# Altium PCB 123.PcbDoc
Units mil, origin at the board's own origin, x right, y up, seen from the top; angles counter-clockwise.
Board outline 27559.06 x 27559.06 mil, 2 copper layers (TopLayer, BottomLayer); 43 components, 558 nets, 272 pads, 0 vias.
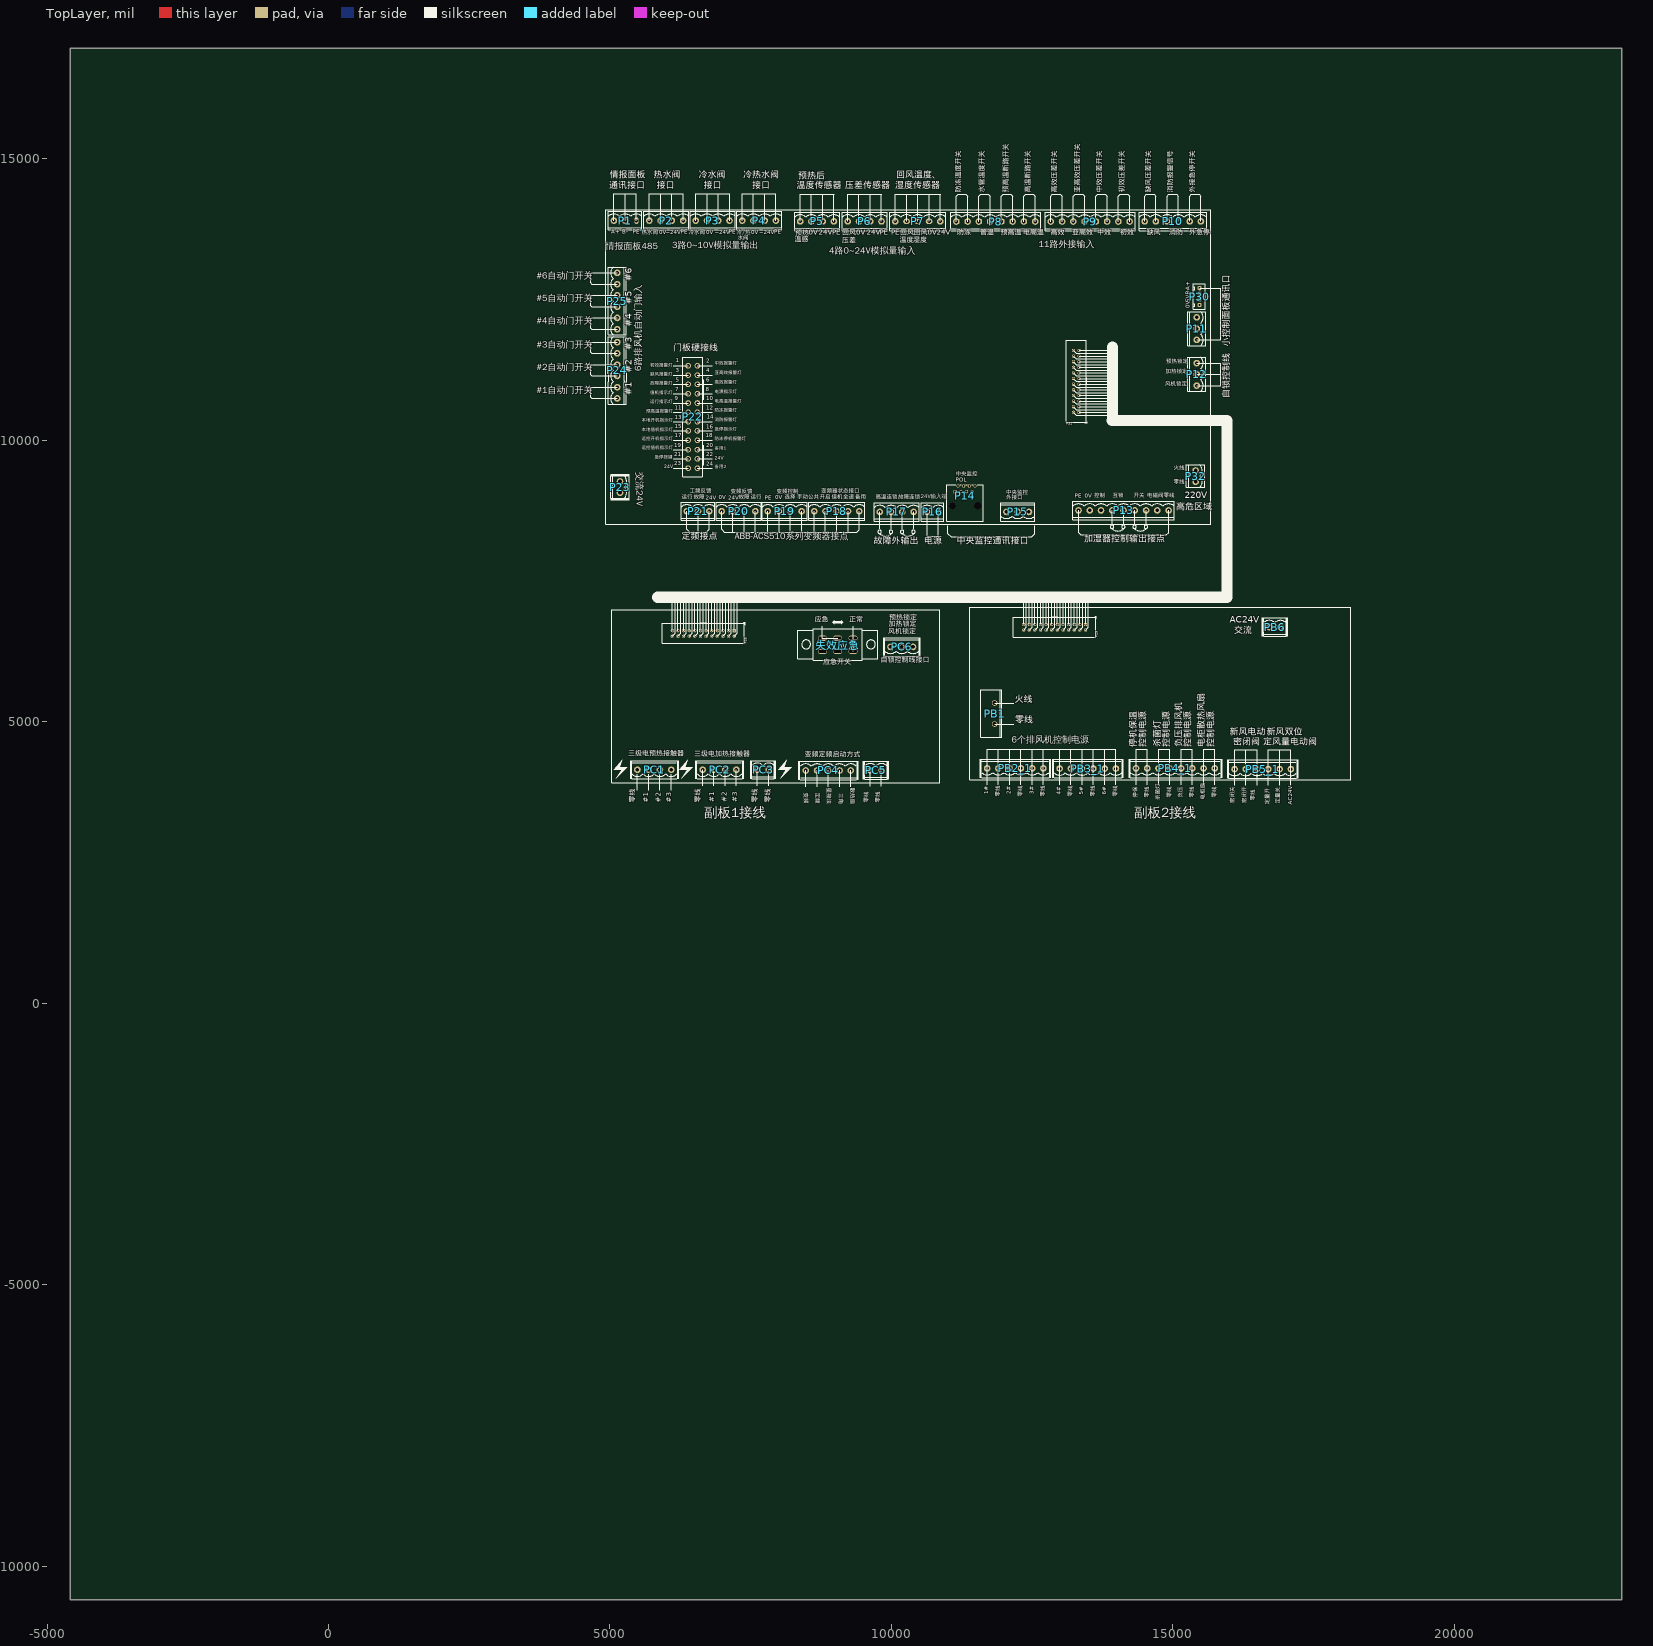
[diagram p0: TopLayer view]
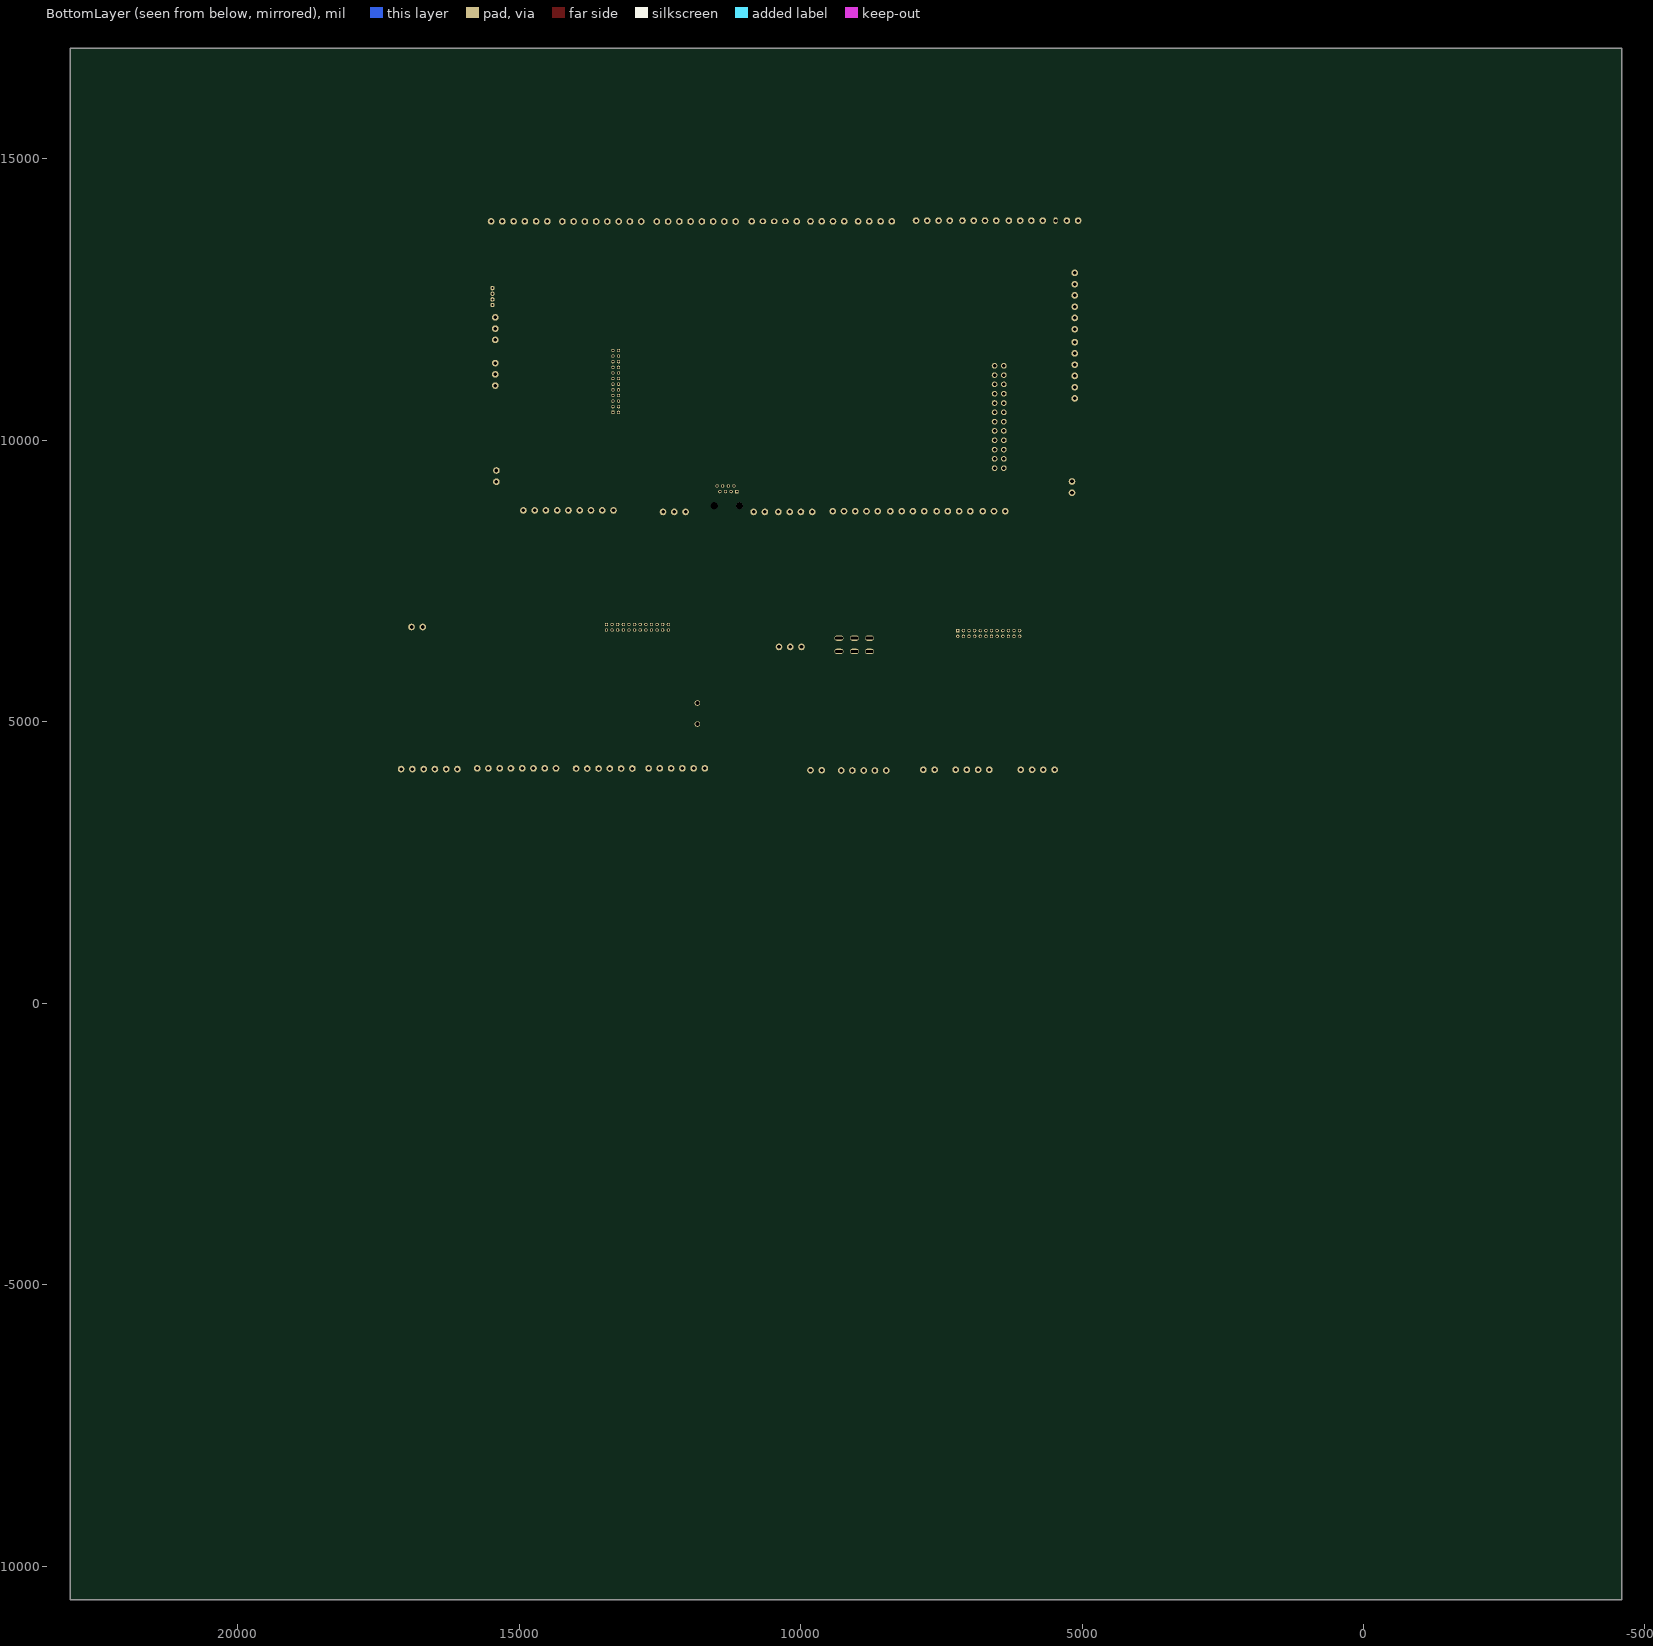
[diagram p1: BottomLayer view, seen from below]

## Layer stack, top to bottom
TopSolder: solder mask 0.4, Solder Resist, Dk 3.5
TopLayer: signal copper 1.4
Dielectric1: dielectric 12.6, FR-4, Dk 4.8
BottomLayer: signal copper 1.4
BottomSolder: solder mask 0.4, Solder Resist, Dk 3.5

## Board outline
-4585.22,16963.99 22973.83,16963.99 22973.83,-10595.06 -4585.22,-10595.06

## Design rules (kind name [scope] priority, off if disabled: settings)
Clearance Clearance_2 [All] p1: gap=8
Clearance Clearance_1 [All] p2 off: gap=20
Clearance [All] p3 off: gap=15
ComponentClearance [All] p1 off: gap=10 collisioncheckmode=3 verticalgap=10 showdistances=FALSE
FabricationTestPointUsage TestPointUsage [All] p1: valid=0 allowmultiple=FALSE
FabricationTestpoint Testpoint [(IsPad And (OnTopLayer Or OnBottomLayer))] p1: side=3 testpointundercomponent=TRUE minsize=40 maxsize=100 preferedsize=60 minholesize=20 maxholesize=40 preferedholesize=32 testpointgrid=1 allowsidetop=TRUE allowsidebottom=TRUE usegrid=TRUE gridtolerance=0.01
PolygonConnect PolygonConnect_1 [All vs (InPadClass('All Pads'))] p1: connectstyle=NoConnect reliefconductorwidth=10 reliefentries=4 polygonreliefangle="90 Angle" airgapwidth=10
PolygonConnect [All] p2: connectstyle=Direct reliefconductorwidth=10 reliefentries=4 polygonreliefangle="90 Angle" airgapwidth=10
RoomDefinition PolXMain [InComponentClass('PolXMain')] p1: confinementstyle=ConfineIn formatcopy=TRUE lockcomponents=FALSE outline 23018.83,-10508.12 61763.06,-10508.12 61763.06,-7249.06 23018.83,-7249.06
RoutingVias [All] p1: holewidth=15 width=25 viastyle="Through Hole" minholewidth=15 minwidth=25 maxholewidth=15 maxwidth=25
ShortCircuit [All] p1 off: allowed=FALSE
SilkToSolderMaskClearance SilkscreenOverComponentPads [IsPad] p1: minsilkscreentomaskgap=10 clearancetoexposedcopper=TRUE
SolderMaskExpansion [All] p1: expansion=4
Width [All] p1: maxlimit=300 minlimit=10 preferedwidth=30
24 further rules are at their usual default settings.

## Classes and differential pairs
component class PolXMain: C77

## Components (designator, comment, footprint, x,y, rotation, side; value= is the part's Value field where it differs from the comment)
P1 "" PL3X#1 5470,13905 r180 top (schematic designator 485-1)
P2 "热水执行" PL4X 6000,13905 r180 top (schematic designator 热水阀执行1)
P3 "冷水执行" PL4X 6825,13905 r0 top (schematic designator 冷水阀执行1)
P4 "冷/热水阀" PL4X 7650,13905 r180 top (schematic designator 冷/热水阀1)
P5 "N1000" PL4X 8680,13890 r0 top (schematic designator 预热温感1)
P6 "压差" PL4X 9525,13890 r180 top (schematic designator 压差传感器1)
P7 "回风温湿" PL5X#1 10470,13890 r0 top (schematic designator 回风温湿传感器1)
P8 "DI-3" PL8X 11855,13888.56 r180 top (schematic designator P1)
P9 "DI-2" PL8X 13532.96,13888.56 r0 top (schematic designator P5)
P10 "DI-1" PL6X 15000,13890 r180 top (schematic designator P9)
P11 "" PL3X#2 15424.5,11785 r90 top (schematic designator 485-2)
P12 "Header 3" PL3X#2 15424.5,11373.16 r270 top (schematic designator P25)
P13 "Header 9" PL9X 14125,8755 r0 top (schematic designator 加湿器1)
P14 "Header 4X2" RH45 11310,9015 r0 top
P15 "Header 3" PL3X#2 12045,8728.56 r0 top
P16 "power" PL2X 10735,8728.56 r0 top (schematic designator 24V)
P17 "硬接线" PL4X 10095,8728.56 r180 top (schematic designator 电柜内部1)
P18 "硬接线" PL5X#2 9030,8740 r180 top (schematic designator 变频1)
P19 "硬接线" PL4X 8105,8740 r180 top (schematic designator 变频2)
P20 "变频反馈" PL4X 7285,8740 r180 top (schematic designator 变频3)
P21 "工频反馈" PL3X#2 6365,8740 r0 top (schematic designator 电柜内部2)
P22 "硬接线" ATX_24PIN 6389.65,11324.9 r270 top (schematic designator 门控指示灯1)
P23 "硬接线" PL2XQ 5179.44,9169.84 r90 top
P24 "自动门" PL6X 5130,11245 r270 top (schematic designator P14)
P25 "自动门" PL6X 5130,12475 r90 top (schematic designator P17)
P28 "Con2*12-1mm" FC24LX 6658.9,6570 r180 top (schematic designator P27)
P29 "Con2*12-1mm" FC24LX 12900,6680 r180 top (schematic designator P27)
P30 "硬接线" C3-4 15475,12555 r90 top (schematic designator 220V)
P31 "Con2*12-1mm" FC24LX 13285,11047.78 r90 top (schematic designator P27)
P32 "硬接线" PL2X 15405,9365 r90 top
PB1 "硬接线" 95-2P 11835,4960 r90 top (schematic designator AC24Vin2)
PB2_1 "Header 6" PL6XQ 12201.74,4172.85 r0 top (schematic designator 客户接线2)
PB3_1 "Header 6" PL6XQ 13490,4170 r0 top (schematic designator 客户接线3)
PB4_1 "Header 8" PL8XQ 15046.74,4172.85 r0 top (schematic designator 杀菌/停保)
PB5_1 "硬接线" PL6XQ 16597.4,4160.47 r0 top (schematic designator 客接新?)
PB6 "硬接线" PL2XQ 16813.22,6684.27 r180 top (schematic designator AC24Vin2)
PC1 "Header 4" PL4XQ 5788.89,4148.47 r0 top (schematic designator 再热)
PC2 "Header 4" PL4XQ 6947.2,4148.47 r0 top (schematic designator 预热)
PC3 "硬接线" PL2XQ 7719.72,4148.47 r180 top (schematic designator P24)
PC4 "硬接线" PL5XQ 8880,4135 r180 top (schematic designator 送风机)
PC5 "硬接线" PL2XQ 9725,4140 r180 top (schematic designator P24)
PC6 "Header 3" PL3XQ 9985,6330 r0 top (schematic designator 火线)
失效应急 "Header 6" SW220V 9048.15,6367.91 r0 top

## Footprints (in the part's own frame and the unit in brackets; to place one, negate y for a bottom-side part, rotate by r counter-clockwise, add the part's x,y. Pads: shape width x height; smd on the part's side, far side on the other; paste and mask are expansions set on the pad)
95-2P [mm]
  round 2.5 hole 1.8: 1(0,0) 2(9.5,0)
  silkscreen extent -6,-3.3 15.5,6.28
ATX_24PIN [mm]
  round 2.54 hole 1.6: 1(0,0) 2(0,4.2) 3(4.2,0) 4(4.2,4.2) 5(8.4,0) 6(8.4,4.2) 7(12.6,0) 8(12.6,4.2) 9(16.8,0) 10(16.8,4.2) 11(21,0) 12(21,4.2) 13(25.2,0) 14(25.2,4.2) 15(29.4,0) 16(29.4,4.2) 17(33.6,0) 18(33.6,4.2) 19(37.8,0) 20(37.8,4.2) 21(42,0) 22(42,4.2) 23(46.2,0) 24(46.2,4.2)
  silkscreen extent -3.82,-2.51 50.01,7.1
C3-4 [mm]
  round 2 hole 1: 1(-3.81,0) 2(-1.27,0) 3(1.27,0) 4(3.81,0)
  silkscreen extent -5.71,-2.54 5.71,2.79, body extent -5.79,-2.62 5.79,2.87, height 10
FC24LX [mm]
  rect 1.5x1.5 hole 0.9: 1(-13.97,-1.27)
  round 1.5 hole 0.9: 2(-13.97,1.27) 3(-11.43,-1.27) 4(-11.43,1.27) 5(-8.89,-1.27) 6(-8.89,1.27) 7(-6.35,-1.27) 8(-6.35,1.27) 9(-3.81,-1.27) 10(-3.81,1.27) 11(-1.27,-1.27) 12(-1.27,1.27) 13(1.27,-1.27) 14(1.27,1.27) 15(3.81,-1.27) 16(3.81,1.27) 17(6.35,-1.27) 18(6.35,1.27) 19(8.89,-1.27) 20(8.89,1.27) 21(11.43,-1.27) 22(11.43,1.27) 23(13.97,-1.27) 24(13.97,1.27)
  silkscreen extent -18.9,-5.01 18.54,4.5
PL2X [mm]
  round 3 hole 1.6: 1(-2.54,0) 2(2.54,0)
  silkscreen extent -5.08,-4.13 5.08,4.13
PL2XQ [mm]
  round 3 hole 1.6: 1(-2.54,0) 2(2.54,0)
  silkscreen extent -5.95,-4.25 5.95,4.25
PL3X#1 [mm]
  oval 1.905x3 hole 1.6: 1(0,0)
  round 3 hole 1.6: 2(5.08,0) 3(10.16,0)
  silkscreen extent -2.54,-4.13 12.7,4.13
PL3X#2 [mm]
  round 3 hole 1.6: 1(0,0) 2(5.08,0) 3(10.16,0)
  silkscreen extent -2.54,-4.13 12.7,4.13
PL3XQ [mm]
  round 3 hole 1.6: 1(0,0) 2(5.08,0) 3(10.16,0)
  silkscreen extent -3.41,-4.25 13.57,4.25
PL4X [mm]
  round 3 hole 1.6: 1(-7.62,0) 2(-2.54,0) 3(2.54,0) 4(7.62,0)
  silkscreen extent -10.16,-4.13 10.16,4.13
PL4XQ [mm]
  round 3 hole 1.6: 1(-7.62,0) 2(-2.54,0) 3(2.54,0) 4(7.62,0)
  silkscreen extent -11.03,-4.25 11.03,4.25
PL5X#1 [mm]
  round 3 hole 1.6: 1(-10.16,0) 5(10.16,0)
  oval 3x2.54 hole 1.6: 2(-5.08,0) 3(0,0) 4(5.08,0)
  silkscreen extent -12.7,-4.13 12.7,4.13
PL5X#2 [mm]
  round 3 hole 1.6: 1(-10.16,0) 2(-5.08,0) 3(0,0) 4(5.08,0) 5(10.16,0)
  silkscreen extent -12.7,-4.13 12.7,4.13
PL5XQ [mm]
  round 3 hole 1.6: 1(-10.16,0) 2(-5.08,0) 3(0,0) 4(5.08,0) 5(10.16,0)
  silkscreen extent -13.57,-4.25 13.57,4.25
PL6X [mm]
  round 3 hole 1.6: 1(-12.7,0) 2(-7.62,0) 3(-2.54,0) 4(2.54,0) 5(7.62,0) 6(12.7,0)
  silkscreen extent -15.24,-4.13 15.24,4.13
PL6XQ [mm]
  round 3 hole 1.6: 1(-12.7,0) 2(-7.62,0) 3(-2.54,0) 4(2.54,0) 5(7.62,0) 6(12.7,0)
  silkscreen extent -16.11,-4.25 16.11,4.25
PL8X [mm]
  round 3 hole 1.6: 1(-17.78,0) 2(-12.7,0) 3(-7.62,0) 4(-2.54,0) 5(2.54,0) 6(7.62,0) 7(12.7,0) 8(17.78,0)
  silkscreen extent -20.32,-4.13 20.32,4.13
PL8XQ [mm]
  round 3 hole 1.6: 1(-17.78,0) 2(-12.7,0) 3(-7.62,0) 4(-2.54,0) 5(2.54,0) 6(7.62,0) 7(12.7,0) 8(17.78,0)
  silkscreen extent -21.19,-4.25 21.19,4.25
PL9X [mm]
  round 3 hole 1.6: 1(-20.32,0) 2(-15.24,0) 3(-10.16,0) 4(-5.08,0) 5(0,0) 6(5.08,0) 7(10.16,0) 8(15.24,0) 9(20.32,0)
  silkscreen extent -22.86,-4.13 22.86,4.13
RH45 [mm] "NetBar;Enlarged"
  rect 1.5x1.5 hole 0.9: 1(-4.445,1.905)
  round 1.5 hole 0.9: 2(-3.175,4.445) 3(-1.905,1.905) 4(-0.635,4.445) 5(0.635,1.905) 6(1.905,4.445) 7(3.175,1.905) 8(4.445,4.445)
  round 2.95 hole 3.25 unplated: MH1(-5.715,-4.445) MH2(5.715,-4.445)
  silkscreen extent -8.25,-11.43 8.26,5.01, body extent -7.75,-10.99 7.75,5, height 16.38
SW220V [mm]
  oval 4x2.5 hole 1.2 slot 3.5 at 0 deg: 1(-6.885,-3.005) 2(-0.095,-2.995) 3(6.905,-2.995) 4(-6.905,3.005) 5(-0.095,3.005) 6(6.905,3.005)
  silkscreen extent -17.99,-6.9 18.13,7.21

## Part data
P1 P11: library part "Header 3", "Header, 3"
P2 P3 P6: library part "Header 4"
P4 P5 P17: library part "Header 4", "H"
P7: library part "Header 5", "H"
P8 P9: library part "Header 8", "Header, 8"
P10 P24 P25: library part "Header 6", "Header, 6"
P12 P15: "Header, 3-Pin"
P13: "He"
P14: "Header, 4-Pin, Dual row"
P16: library part "Header 2", "Header, 2"
P18: library part "Header 5", "Heade"
P19 P20: library part "Header 4", "Heade"
P21: library part "Header 3", "H"
P22: library part "Header 12X2", "Header, 12"
P23 P32 PC3 PC5: library part "Header 2", "Header, 2-Pin"
P28 P29 P31: library part "Header 12X2", "Header, 12-Pin, Dual row"
P30: library part "Header 4", "Header, 4"
失效应急: "Header, 6-Pin"

## Nets (pads, with @x,y where several pads share a name; then routed paths per layer and width w, separated by ;. In a path a pad name is that pad's centre, name@x,y a point inside that pad or via, vN(x,y) a via of type N, cw(c..) or ccw(c..) an arc to the next point about the centre after c; other vN are vias at no path point)
1C2: 
1C3: 
1C6: 
1C7: 
1C8: 
1C9: 
1C10: 
1C11: 
1C12: 
1C17: 
1C22: 
1C27: 
1C31: 
1C32: 
1C33: 
1C34: 
1C35: 
1C36: 
1C37: 
2-38: 
2-39: 
2-40: 
2-41: 
3-24: 
3-25: 
3-26: 
3-27: 
3-28: 
3-69: 
3-70: 
3-71: 
3-72: 
3V3: 
"3V- S1": 
"3V- S2": 
"3V- S3": 
"3V- S4": 
"3V- S5": 
"3V- SETX1": 
"3V- SETX2": 
"3V- 三角形": 
"3V- 变频": 
"3V- 定频": 
"3V- 星形": 
3V-LAMP-EX1: 
3V-LAMP-EX2: 
3V-中效: 
3V-中效报警灯: 
3V-亚高效: 
3V-亚高效报警灯: 
3V-值机: 
3V-停机保温: 
3V-初效: 
3V-初效报警灯: 
3V-加湿器-加湿互锁: 
3V-加湿器-加湿开关: 
3V-加湿器-加湿电磁阀: 
3V-加热1: 
3V-加热2: 
3V-加热3: 
3V-变频: 
3V-变频开启: 
3V-备用: 
3V-外急停开关: 
3V-外接急停报警: 
3V-定量阀: 
3V-定频: 
3V-密闭阀: 
3V-排风机1: 
3V-排风机2: 
3V-排风机3: 
3V-排风机4: 
3V-排风机5: 
3V-排风机6: 
3V-控制-排风机1: 
3V-控制-排风机2: 
3V-控制-排风机3: 
3V-控制-排风机4: 
3V-控制-排风机5: 
3V-控制-排风机6: 
3V-故障联运输出: 
3V-散热扇: 
3V-星三角: 
3V-机组值机灯: 
3V-机组故障灯: 
3V-机组运行灯: 
3V-杀菌灯: 
3V-消防: 
3V-消防报警: 
3V-电柜扇: 
3V-电热高温报警灯: 
3V-电预热高温报警灯: 
3V-电高温: 
3V-管温: 
3V-缺风: 
3V-缺风报警灯: 
3V-负压: 
3V-远值机: 
3V-远启动: 
3V-远负压: 
3V-防冻: 
3V-防冻停机报警: 
3V-防冻报警灯: 
3V-面板-值机: 
3V-面板-故障: 
3V-面板-滤网: 
3V-面板-运行: 
3V-预热1: 
3V-预热2: 
3V-预热3: 
3V-预高温: 
3V-高效: 
3V-高效报警灯: 
3V-高温联动输出: 
3V<-变频故障: 
3V<-变频运行: 
3V<-工频故障: 
3V<-工频运行: 
3V<-急停按钮: 
3V<-手动冬季: 
3V<-手动夏季: 
3V<-本地值机: 
3V<-本地运行: 
3V<-远值使能: 
3V<-远起使能: 
10V-面板-温度输入: 
10V-面板-湿度输入: 
24V: 
24V-DI: 
24V-中效报警灯: 
24V-亚高效报警灯: 
24V-值机: 
24V-停机保温: 
24V-初效报警灯: 
24V-加湿器-加湿互锁: 
24V-加湿器-加湿开关: 
24V-加湿器-加湿电磁阀: 
24V-加热1: 
24V-加热2: 
24V-加热3: 
24V-变频: 
24V-变频开启: 
24V-备用: 
24V-外接急停报警: 
24V-定量阀: 
24V-定频: 
24V-密闭阀: 
24V-情报-负压: 
24V-情报-远值: 
24V-情报-远启: 
24V-排风机1: 
24V-排风机2: 
24V-排风机3: 
24V-排风机4: 
24V-排风机5: 
24V-排风机6: 
24V-故障联运输出: 
24V-散热扇: 
24V-星三角: 
24V-机组值机灯: 
24V-机组故障灯: 
24V-机组运行灯: 
24V-杀菌灯: 
24V-消防报警: 
24V-电柜扇: 
24V-电热高温报警灯: 
24V-电预热高温报警灯: 
24V-缺风报警灯: 
24V-负压: 
24V-防冻停机报警: 
24V-防冻报警灯: 
24V-面板-值机: 
24V-面板-故障: 
24V-面板-滤网: 
24V-面板-运行: 
24V-预热1: 
24V-预热2: 
24V-预热3: 
24V-高效报警灯: 
24V-高温联动输出: 
24VIN+: 
24VIN-: 
165S_DO1: 
165S_DO2: 
165S_DO3: 
165S_DO4: 
220V_N: 
485-A-1: 
485-A-2: 
485-B-1: 
485-B-2: 
485-GND1: 
485-VCC-1: 
485_GND_1: 
485_GND_2: 
485_VCC_1: 
485_VCC_2: 
<-变频故障: 
<-变频运行: 
<-工频故障: 
<-工频运行: 
<-急停按钮: 
<-本地值机: 
<-本地运行: 
<-远值使能: 
<-远起使能: 
AC24GATE1: 
AC24GATE2: 
AC24V1: 
AC24V2: 
AD1: 
AD2: 
AD5: 
AD6: 
BOOT0: 
BOOT1: 
CAN-RX-2: 
CAN-TX-2: 
CLK_165: 
COM1: 
COM2: 
COM3: 
COM4: 
C变频: 
C情报输出: 
EX_A1: 
EX_B1: 
GND: 
JTCK: 
JTMS: 
L: 
LAMP-EX1: 
LAMP-EX2: 
LED-COM01: 
LED-COM02: 
LED-COM03: 
LED-COM04: 
LED-OUT-PIN01: 
LED-OUT-PIN02: 
LED-OUT-PIN03: 
LED-OUT-PIN04: 
LED-OUT-PIN05: 
LED-OUT-PIN06: 
LED-OUT-PIN07: 
LED-OUT-PIN08: 
LED-OUT-PIN09: 
LED-OUT-PIN10: 
LED-OUT-PIN11: 
LED-OUT-PIN12: 
LED-OUT-PIN13: 
LED-OUT-PIN14: 
LED-OUT-PIN15: 
LED-OUT-PIN16: 
LED-PIN01: 
LED-PIN02: 
LED-PIN03: 
LED-PIN04: 
LED-PIN05: 
LED-PIN06: 
LED-PIN07: 
LED-PIN08: 
LED-PIN09: 
LED-PIN10: 
LED-PIN11: 
LED-PIN12: 
LED-PIN13: 
LED-PIN14: 
LED-PIN15: 
LED-PIN16: 
L加热: 
L变频: 
L预热: 
MAOUT1+: 
MAOUT1-: 
MAOUT2+: 
MAOUT11+: 
MAOUT11-: 
MAOUT21+: 
MCUVBAT: 
NetC4_1: 
NetC5_1: 
NetC6_1: 
NetC7_1: 
NetC8_1: 
NetC9_1: 
NetC10_1: 
NetC11_1: 
NetC12_1: 
NetC16_1: 
NetC17_1: 
NetC18_1: 
NetC25_1: 
NetC26_1: 
NetC27_1: 
NetC28_1: 
NetC29_1: 
NetC30_1: 
NetC31_1: 
NetC32_1: 
NetC33_1: 
NetC34_1: 
NetC35_1: 
NetC36_1: 
NetC72_1: 
NetC73_1: 
NetC79_1: 
NetC81_1: 
NetD1_1: 
NetD2_K: 
NetD3_K: 
NetD4_K: 
NetD5_A: 
NetD5_K: 
NetD6_K: 
NetD7_K: 
NetD8_K: 
NetD9_K: 
NetD10_K: 
NetD11_K: 
NetD13_2: 
NetD15_K: 
NetD16_K: 
NetD17_K: 
NetD18_K: 
NetD37_K: 
NetD38_K: 
NetD39_K: 
NetD40_K: 
NetD41_K: 
NetD42_K: 
NetD43_K: 
NetD44_K: 
NetD45_K: 
NetD46_K: 
NetD47_K: 
NetD48_K: 
NetD49_K: 
NetD50_K: 
NetD51_K: 
NetD52_K: 
NetD53_K: 
NetD54_K: 
NetD55_K: 
NetD61_K: 
NetD65_K: 
NetD67_K: 
NetD95_A: 
NetD96_A: 
NetD97_A: 
NetD98_A: 
NetD109_A: 
NetD110_A: 
NetD199_A: 
NetDZ1_K: 
NetF1_2: 
NetF2_2: 
NetF3_2: 
NetF4_2: 
NetF5_2: 
NetF6_2: 
NetF16_2: 
NetOP1_1: 
NetOP1_3: 
NetOP1_5: 
NetOP1_7: 
NetOP2_1: 
NetOP2_3: 
NetOP2_5: 
NetOP2_7: 
NetOP3_1: 
NetOP3_3: 
NetOP3_5: 
NetOP3_7: 
NetOP4_1: 
NetOP4_3: 
NetOP4_5: 
NetOP4_7: 
NetOP5_1: 
NetOP5_3: 
NetOP5_5: 
NetOP5_7: 
NetOP6_1: 
NetOP6_3: 
NetOP6_5: 
NetOP6_7: 
NetOP7_1: 
NetOP7_3: 
NetOP7_5: 
NetOP7_7: 
NetOP8_1: 
NetQ1_1: 
NetQ1_2: 
NetQ1_3: 
NetQ2_2: 
NetQ2_3: 
NetQ3_1: 
NetQ3_2: 
NetQ3_3: 
NetQ4_2: 
NetQ4_3: 
NetQ5_2: 
NetQ6_2: 
NetQ13_1: 
NetQ13_2: 
NetQ13_3: 
NetQ15_2: 
NetQ15_3: 
NetQ16_2: 
NetQ17_2: 
NetQ18_1: 
NetQ18_2: 
NetQ18_3: 
NetQ19_1: 
NetQ19_2: 
NetQ20_2: 
NetQ21_2: 
NetQ22_2: 
NetR1_2: 
NetR2_2: 
NetR3_2: 
NetR4_2: 
NetR5_2: 
NetR7_1: 
NetR8_1: 
NetR11_2: 
NetR12_2: 
NetR13_2: 
NetR14_2: 
NetR15_2: 
NetR17_1: 
NetR18_1: 
NetR21_2: 
NetR25_2: 
NetR119_1: 
NetR120_1: 
NetR121_1: 
NetR122_1: 
NetR139_1: 
NetR140_1: 
NetR141_1: 
NetR142_1: 
NetR160_1: 
NetR161_2: 
NetR162_2: 
NetR165_1: 
NetR170_1: 
NetR171_1: 
NetR172_1: 
NetR173_1: 
NetR176_2: 
NetR177_2: 
NetR178_1: 
NetR179_1: 
NetR179_2: 
NetR180_2: 
NetR181_2: 
NetRL34_5: 
NetU1X_2: 
NetU1X_4: 
NetU16_2: 
NetU19_2: 
PE: 
PLD_165: 
POL_A2: 
POL_B2: 
PWM1-T8C3: 
PWM2-T8C4: 
PWM3-T8C1: 
PWM4-T8C2: 
PWM5-T1C1: 
PWM6-T1C2: 
PWM7-T1C3: 
PWM8-T1C4: 
RESET: 
ROUT1: 
ROUT2: 
ROUT3: 
ROUT4: 
ROUT5: 
ROUT6: 
ROUT7: 
ROUT8: 
ROUT9: 
ROUT10: 
ROUT11: 
ROUT12: 
ROUT13: 
ROUT14: 
ROUT22: 
ROUT23: 
ROUT24: 
ROUT25: 
ROUT26: 
ROUT27: 
ROUT28: 
ROUT29: 
SDO_165: 
STM32-R/T2: 
STM32-R/T3: 
STM32-R/T4: 
STM32-RX1: 
STM32-RX2: 
STM32-RX3: 
STM32-RX4: 
STM32-RX5: 
STM32-TX1: 
STM32-TX2: 
STM32-TX3: 
STM32-TX4: 
STM32-TX5: 
VCC: 
VCC-SEL: 
VIN0~10V(1): 
VIN0~10V(2): 
三角接法: 
中效: 
亚高效: 
冷/热水: 
冷水阀执行: 
初效: 
加湿器控制: 
变频值机: 
变频全速: 
变频备用: 
变频开启: 
变频控制电压选择: 
回风压差: 
回风温度: 
回风湿度: 
外急停开关: 
大地: 
定量关: 
定量开: 
密闭关: 
密闭开: 
手动调速: 
手动频率: 
星接法: 
消防: 
热水阀执行: 
电高温: 
硬接线-温度: 
硬接线-湿度: 
管温: 
缺风: 
自动门开关1: 
自动门开关2: 
自动门开关3: 
自动门开关4: 
自动门开关5: 
自动门开关6: 
设定温度: 
设定湿度: 
防冻: 
预热温感: 
预高温: 
频率输出: 
高效: 
pads on no net: P1.1 P1.2 P1.3 P2.1 P2.2 P2.3 P2.4 P3.1 P3.2 P3.3 P3.4 P4.1 P4.2 P4.3 P4.4 P5.1 P5.2 P5.3 P5.4 P6.1 P6.2 P6.3 P6.4 P7.1 P7.2 P7.3 P7.4 P7.5 P8.1 P8.2 P8.3 P8.4 P8.5 P8.6 P8.7 P8.8 P9.1 P9.2 P9.3 P9.4 P9.5 P9.6 P9.7 P9.8 P10.1 P10.2 P10.3 P10.4 P10.5 P10.6 P11.1 P11.2 P11.3 P12.1 P12.2 P12.3 P13.1 P13.2 P13.3 P13.4 P13.5 P13.6 P13.7 P13.8 P13.9 P14.1 P14.2 P14.3 P14.4 P14.5 P14.6 P14.7 P14.8 P14.MH1 P14.MH2 P15.1 P15.2 P15.3 P16.1 P16.2 P17.1 P17.2 P17.3 P17.4 P18.1 P18.2 P18.3 P18.4 P18.5 P19.1 P19.2 P19.3 P19.4 P20.1 P20.2 P20.3 P20.4 P21.1 P21.2 P21.3 P22.1 P22.2 P22.3 P22.4 P22.5 P22.6 P22.7 P22.8 P22.9 P22.10 P22.11 P22.12 P22.13 P22.14 P22.15 P22.16 P22.17 P22.18 P22.19 P22.20 P22.21 P22.22 P22.23 P22.24 P23.1 P23.2 P24.1 P24.2 P24.3 P24.4 P24.5 P24.6 P25.1 P25.2 P25.3 P25.4 P25.5 P25.6 P28.1 P28.2 P28.3 P28.4 P28.5 P28.6 P28.7 P28.8 P28.9 P28.10 P28.11 P28.12 P28.13 P28.14 P28.15 P28.16 P28.17 P28.18 P28.19 P28.20 P28.21 P28.22 P28.23 P28.24 P29.1 P29.2 P29.3 P29.4 P29.5 P29.6 P29.7 P29.8 P29.9 P29.10 P29.11 P29.12 P29.13 P29.14 P29.15 P29.16 P29.17 P29.18 P29.19 P29.20 P29.21 P29.22 P29.23 P29.24 P30.1 P30.2 P30.3 P30.4 P31.1 P31.2 P31.3 P31.4 P31.5 P31.6 P31.7 P31.8 P31.9 P31.10 P31.11 P31.12 P31.13 P31.14 P31.15 P31.16 P31.17 P31.18 P31.19 P31.20 P31.21 P31.22 P31.23 P31.24 P32.1 P32.2 PB1.1 PB1.2 PB2_1.1 PB2_1.2 PB2_1.3 PB2_1.4 PB2_1.5 PB2_1.6 PB3_1.1 PB3_1.2 PB3_1.3 PB3_1.4 PB3_1.5 PB3_1.6 PB4_1.1 PB4_1.2 PB4_1.3 PB4_1.4 PB4_1.5 PB4_1.6 PB4_1.7 PB4_1.8 PB5_1.1 PB5_1.2 PB5_1.3 PB5_1.4 PB5_1.5 PB5_1.6 PB6.1 PB6.2 PC1.1 PC1.2 PC1.3 PC1.4 PC2.1 PC2.2 PC2.3 PC2.4 PC3.1 PC3.2 PC4.1 PC4.2 PC4.3 PC4.4 PC4.5 PC5.1 PC5.2 PC6.1 PC6.2 PC6.3 失效应急.1 失效应急.2 失效应急.3 失效应急.4 失效应急.5 失效应急.6

## Silkscreen, mask and mechanical layers (free items; w line width, h text height)
TopOverlay:
  drawing of 460 lines, arcs and shapes, not listed
  text "情报面板" at 4995,14620 h200
  text "热水阀" at 5775,14620 h200
  text "冷水阀" at 6580,14620 h200
  text "冷热水阀" at 7370,14620 h200
  text "回风温度、" at 10090,14620 h200
  text "预热后" at 8345,14605 h200
  text "温度传感器" at 8315,14435.37 h200
  text "湿度传感器" at 10065,14435.37 h200
  text "通讯接口" at 4985,14435 h200
  text "接口" at 5830,14435 h200
  text "接口" at 6665,14435 h200
  text "接口" at 7530,14435 h200
  text "压差传感器" at 9180,14435 h200
  text "防冻温度开关" at 11270,14399.86 h150 r90
  text "水管温度开关" at 11685,14400 h150 r90
  text "预高温断路开关" at 12115,14399.86 h150 r90
  text "高温断路开关" at 12500,14400 h150 r90
  text "高效压差开关" at 12970,14400 h150 r90
  text "亚高效压差开关" at 13385,14400 h150 r90
  text "中效压差开关" at 13770,14399.86 h150 r90
  text "初效压差开关" at 14175,14400 h150 r90
  text "缺风压差开关" at 14645,14400 h150 r90
  text "消防报警信号" at 15035,14399.86 h150 r90
  text "外接急停开关" at 15422.81,14400 h150 r90
  text "A+" at 5025,13640 h118.11
  text "B-" at 5220,13640 h118.11
  text "PE" at 5410,13640 h118.11
  text "PE" at 6260,13640 h118.11
  text "PE" at 7110,13640 h118.11
  text "PE" at 7920,13640 h118.11
  text "0V" at 5880,13638.8 h118.11
  text "~24V" at 5993.21,13638.8 h118.11
  text "0V" at 6710,13638.8 h118.11
  text "~24V" at 6860,13638.8 h118.11
  text "0V" at 7515,13638.8 h118.11
  text "~24V" at 7650,13638.8 h118.11
  text "热水阀" at 5565,13632.9 h118.11
  text "冷水阀" at 6400,13632.9 h118.11
  text "冷/热" at 7250,13632.9 h118.11
  text "防冻" at 11175,13620.33 h150
  text "管温" at 11575,13620.55 h150
  text "中效" at 13660,13620.33 h150
  text "初效" at 14065,13620.33 h150
  text "缺风" at 14540,13620.55 h150
  text "消防" at 14935,13620.33 h150
  text "预高温" at 11945,13619.78 h150
  text "电高温" at 12345,13619.78 h150
  text "高效" at 12835,13619.78 h150
  text "亚高效" at 13210,13619.78 h150
  text "外急停" at 15290,13620 h150
  text "PE" at 8950.04,13616.7 h150
  text "PE" at 9790,13616.7 h150
  text "PE" at 9995,13616.7 h150
  text "0V" at 8535.1,13615.18 h150
  text "24V" at 8710.1,13615.18 h150
  text "0V" at 9380,13615.18 h150
  text "24V" at 9560,13615.18 h150
  text "0V" at 10642.38,13615.18 h150
  text "24V" at 10803.79,13615.18 h150
  text "回风" at 9130,13614.76 h150
  text "回风" at 10155,13614.76 h150
  text "回风" at 10395,13614.76 h150
  text "预热" at 8290.1,13607.68 h150
  text "水阀" at 7270,13540 h118.11
  text "温感" at 8285.1,13490 h150
  text "温度" at 10150,13482.68 h150
  text "湿度" at 10389.86,13482.68 h150
  text "压差" at 9125,13473.67 h150
  text "11路外接输入" at 12620,13385 h200
  text "3路0~10V模拟量输出" at 6105,13365 h200
  text "情报面板485" at 4924.82,13350 h200
  text "4路0~24V模拟量输入" at 8895,13275 h200
  text "#6自动门开关" at 3700,12830 h200
  text "#6" at 5431.2,12825 h200 r90
  text "A+" at 15326.09,12669.39 h118.11 r90
  text "B-" at 15326.09,12584.6 h118.11 r90
  text "5V" at 15326.09,12458.21 h118.11 r90
  text "#5自动门开关" at 3700,12430 h200
  text "#5" at 5430,12420 h200 r90
  text "0V" at 15327.3,12345 h118.11 r90
  text "#4自动门开关" at 3700,12025 h200
  text "#4" at 5430,12015 h200 r90
  text "小控制面板通讯口" at 16050,11660 h200 r90
  text "#3" at 5431.2,11605 h200 r90
  text "#3自动门开关" at 3700,11600 h200
  text "门板硬接线" at 6127.48,11545 h200
  text "1" at 6170,11360 h120
  text "2" at 6710,11355 h120
  text "预热锁定" at 14880,11340 h118.11
  text "中效报警灯" at 6859.91,11315 h100
  text "初效报警灯" at 5719.54,11285 h100
  text "6路排风机自动门输入" at 5605,11230 h200 r90
  text "#2" at 5431.2,11205 h200 r90
  text "#2自动门开关" at 3700,11200 h200
  text "3" at 6170,11185 h120
  text "4" at 6710,11180 h120
  text "加热锁定" at 14875,11165 h118.11
  text "亚高效报警灯" at 6860,11147.71 h100
  text "缺风报警灯" at 5720,11121.22 h100
  text "5" at 6170,11015 h120
  text "6" at 6710,11015 h120
  text "高效报警灯" at 6860,10980.42 h100
  text "故障报警灯" at 5720,10957.99 h100
  text "风机锁定" at 14870,10945 h118.11
  text "7" at 6160,10850 h120
  text "8" at 6705,10850 h120
  text "电源指示灯" at 6860,10812.58 h100
  text "#1" at 5431.53,10805 h200 r90
  text "值机指示灯" at 5719.63,10794.12 h100
  text "#1自动门开关" at 3700,10790 h200
  text "自锁控制线" at 16050,10750 h200 r90
  text "9" at 6155,10690 h120
  text "10" at 6710,10683 h120
  text "电高温报警灯" at 6860,10645.56 h100
  text "运行指示灯" at 5720,10629.88 h100
  text "11" at 6150,10520 h120
  text "12" at 6715,10520 h120
  text "防冻报警灯" at 6859.91,10478.37 h100
  text "预高温报警灯" at 5644.43,10467.12 h100
  text "14" at 6720,10355 h120
  text "13" at 6155,10350 h120
  text "消防报警灯" at 6859.91,10311.08 h100
  text "本地开机指示灯" at 5568.67,10303.34 h100
  text "15" at 6150,10190 h120
  text "16" at 6710,10183 h120
  text "急停指示灯" at 6859.91,10143.23 h100
  text "本地值机指示灯" at 5568.67,10139.74 h100
  text "17" at 6155,10025 h120
  text "18" at 6704.89,10025 h120
  text "远控开机指示灯" at 5568.39,9976.15 h100
  text "防冻停机报警灯" at 6859.91,9976.59 h100
  text "19" at 6145,9855 h120
  text "20" at 6710,9855 h120
  text "远控值机指示灯" at 5568.39,9812.55 h100
  text "备用1" at 6859.91,9809.58 h100
  text "21" at 6140,9695.67 h120
  text "22" at 6710,9690.67 h120
  text "急停按键" at 5795.67,9648.59 h100
  text "24V" at 6860,9631.65 h100
  text "23" at 6140,9530 h120
  text "24" at 6715,9525 h120
  text "24V" at 5966.14,9475 h100
  text "备用2" at 6859.91,9475 h100
  text "火线" at 15020,9455 h120
  text "交流24V" at 5430,9430 h200 r270
  text "中央监控" at 11145.47,9345 h118.11
  text "POL" at 11145,9240 h118.11
  text "零线" at 15020,9200 h120
  text "工频反馈" at 6415,9045 h120
  text "变频器状态接口" at 8755,9045 h120
  text "变频反馈" at 7145,9035 h120
  text "变频控制" at 7965,9035 h120
  text "中央监控" at 12040.47,9020 h118.11
  text "控制" at 13608.31,8960.83 h120
  text "互锁" at 13930.16,8960.83 h120
  text "开关" at 14309.1,8960.83 h120
  text "电磁阀" at 14549.25,8960.83 h120
  text "零线" at 14839.61,8960.83 h120
  text "PE" at 13257.92,8957.87 h120
  text "0V" at 13432.13,8957.87 h120
  text "24V输入端" at 10520,8945 h118.11
  text "故障" at 6485,8935 h120
  text "故障" at 7290,8935 h120
  text "手动" at 8325,8934.56 h120
  text "公共" at 8519.73,8934.22 h120
  text "开启" at 8729.43,8934.67 h120
  text "值机" at 8939.13,8934.67 h120
  text "备用" at 9358.42,8935 h120
  text "运行" at 6280,8933.67 h120
  text "运行" at 7500,8933.67 h120
  text "选择" at 8110,8933.44 h120
  text "全速" at 9148.72,8933.11 h120
  text "高温连锁" at 9725.06,8932.9 h118.11
  text "故障连锁" at 10124.07,8932.9 h118.11
  text "外接口" at 12040.47,8925 h118.11
  text "220V" at 15210,8925 h200
  text "0V" at 6935,8923.33 h120
  text "0V" at 7941.56,8923.33 h120
  text "24V" at 6700,8922.22 h120
  text "24V" at 7100,8922.22 h120
  text "PE" at 7750,8922.22 h120
  text "高危区域" at 15065,8720 h200
  text "定频接点" at 6275,8200 h200
  text "ABB-ACS510系列变频器接点" at 7220,8200 h200
  text "加湿器控制输出接点" at 13425,8155 h200
  text "故障外输出" at 9690,8120.93 h200
  text "电源" at 10585,8119.44 h200
  text "中央监控通讯接口" at 11165,8120 h200
  text "预热锁定" at 9960,6775 h150
  text "应急" at 8635,6745 h150
  text "正常" at 9250,6740 h150
  text "AC24V" at 16015.11,6715.5 h200
  text "加热锁定" at 9950,6660 h150
  text "风机锁定" at 9945,6525 h150
  text "交流" at 16095,6525 h200
  text "自锁控制线接口" at 9815,6025 h150
  text "应急开关" at 8790,5985 h150
  text "火线" at 12195,5300 h200
  text "零线" at 12205,4940 h200
  text "新风电动" at 16010,4725 h200
  text "新风双位" at 16670,4725 h200
  text "6个排风机控制电源" at 12135,4580 h200
  text "停机保温" at 14395,4550.18 h200 r90
  text "杀菌灯" at 14820,4550.18 h200 r90
  text "负压排风机" at 15200,4550.18 h200 r90
  text "电柜散热风扇" at 15605,4550.18 h200 r90
  text "控制电源" at 14560,4550 h200 r90
  text "控制电源" at 14985,4550 h200 r90
  text "控制电源" at 15365,4550 h200 r90
  text "控制电源" at 15770,4550 h200 r90
  text "密闭阀" at 16070,4545 h200
  text "定风量电动阀" at 16610,4545 h200
  text "三级电预热接触器" at 5330,4360 h150
  text "三级电加热接触器" at 6495,4350 h150
  text "变频定频启动方式" at 8460,4340 h150
  text "星接法" at 8833.89,3829.62 h118.11 r270
  text "散热扇" at 9248.89,3824.7 h118.11 r270
  text "定频" at 8628.89,3742.28 h118.11 r270
  text "变频" at 8423.89,3741.85 h118.11 r270
  text "三角" at 9043.89,3732.67 h118.11 r270
  text "1#" at 11752.15,3711.3 h118.11 r90
  text "2#" at 12152.15,3710.49 h118.11 r90
  text "3#" at 12552.15,3710.49 h118.11 r90
  text "5#" at 13440.4,3708.4 h118.11 r90
  text "6#" at 13840.4,3707.13 h118.11 r90
  text "4#" at 13040.4,3704.94 h118.11 r90
  text "零线" at 11952.15,3672.39 h118.11 r90
  text "零线" at 12352.15,3672.39 h118.11 r90
  text "零线" at 12752.15,3672.39 h118.11 r90
  text "零线" at 13240.4,3669.54 h118.11 r90
  text "零线" at 13640.4,3669.54 h118.11 r90
  text "零线" at 14040.4,3669.54 h118.11 r90
  text "负压" at 15197.15,3653.31 h118.11 r90
  text "停保" at 14397.15,3652.56 h118.11 r90
  text "零线" at 14597.15,3652.39 h118.11 r90
  text "零线" at 14997.15,3652.39 h118.11 r90
  text "零线" at 15397.15,3652.39 h118.11 r90
  text "零线" at 15797.15,3652.39 h118.11 r90
  text "电柜扇" at 15597.15,3611.11 h118.11 r90
  text "杀菌灯" at 14797.15,3609.5 h118.11 r90
  text "零线" at 16480,3595 h118.11 r90
  text "#1" at 6890,3570 h150 r90
  text "#2" at 7110,3570 h150 r90
  text "#3" at 7300,3570 h150 r90
  text "零线" at 5475,3565 h150 r90
  text "#1" at 5715,3565 h150 r90
  text "#2" at 5935,3565 h150 r90
  text "#3" at 6125,3565 h150 r90
  text "零线" at 6640,3565 h150 r90
  text "零线" at 7650,3565 h150 r90
  text "零线" at 7880,3565 h150 r90
  text "零线" at 9620.27,3565 h118.11 r90
  text "零线" at 9820.27,3565 h118.11 r90
  text "密闭关" at 16120,3555 h118.11 r90
  text "密闭开" at 16330,3549.89 h118.11 r90
  text "定量关" at 16930,3544.78 h118.11 r90
  text "定量开" at 16740,3530 h118.11 r90
  text "AC24V" at 17145,3525 h118.11 r90
  text "副板1接线" at 6675,3240 h300
  text "副板2接线" at 14315,3240 h300